# Altium PCB Copy2 of PCB1.PcbDoc
Units mm, origin at the board's own origin, x right, y up, seen from the top; angles counter-clockwise.
Board outline 100 x 25 mm, 2 copper layers (Top Layer, Bottom Layer); 22 components, 34 nets, 106 pads, 35 vias.
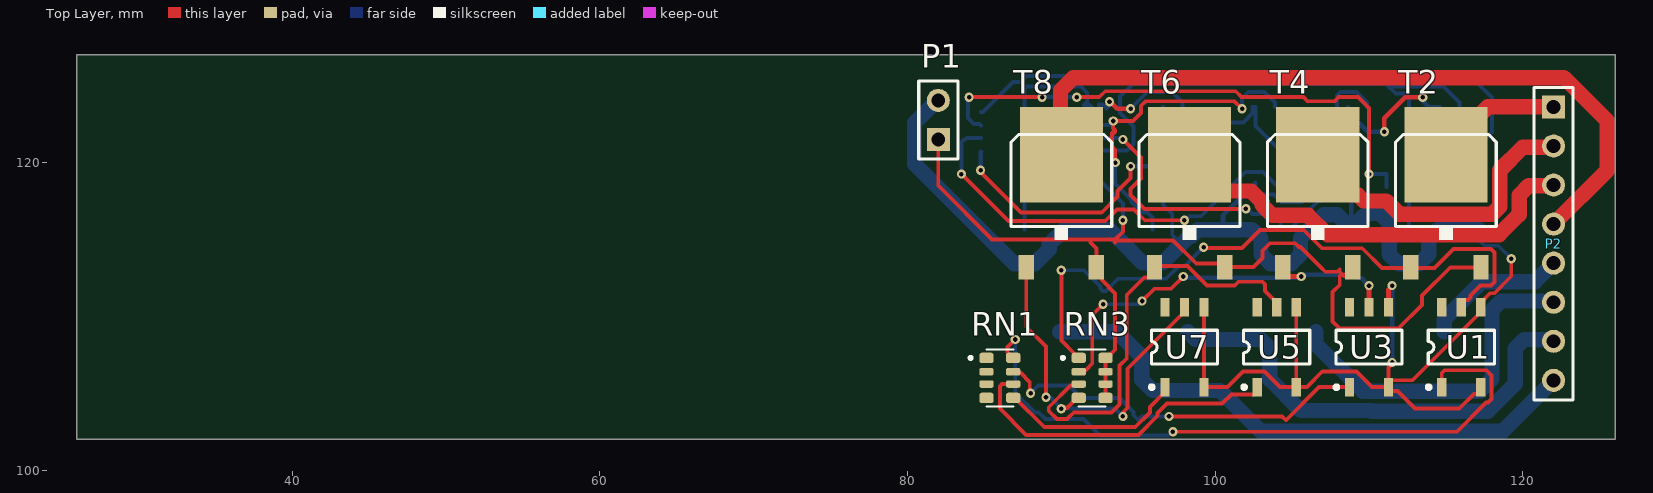
[diagram p0: Top Layer view]
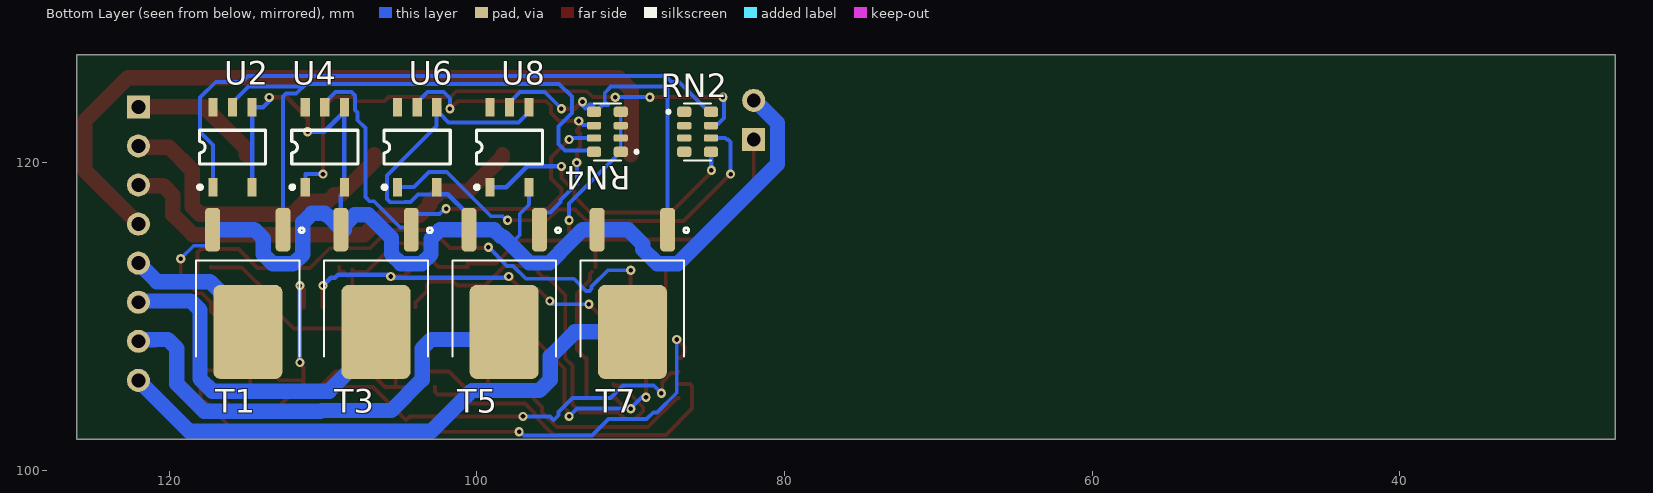
[diagram p1: Bottom Layer view, seen from below]

## Layer stack, top to bottom
Top Solder: solder mask 0.0102, Solder Resist, Dk 3.5
Top Layer: signal copper 0.0356
Dielectric 1: dielectric 0.32, FR-4, Dk 4.8
Bottom Layer: signal copper 0.0356
Bottom Solder: solder mask 0.0102, Solder Resist, Dk 3.5

## Board outline
26,127 126,127 126,102 26,102

## Design rules (kind name [scope] priority, off if disabled: settings)
Clearance [All] p1: gap=0.256 ignorepadtopadclearanceinfootprint=FALSE
PolygonConnect [All] p1: connectstyle=Relief reliefconductorwidth=0.254 reliefentries=4 polygonreliefangle="90 Angle" airgapwidth=0.254
RoomDefinition SheetBridge1 [InComponentClass('SheetBridge1')] p1: confinementstyle=ConfineIn formatcopy=TRUE lockcomponents=FALSE outline 131.854,101.316 186.464,101.316 186.464,124.684 131.854,124.684
RoutingVias [All] p1: holewidth=0.3 width=0.6 viastyle="Through Hole" minholewidth=0.3 minwidth=0.6 maxholewidth=0.6 maxwidth=1.27
SolderMaskExpansion [All] p1: expansion=0.102 istentingtop=FALSE
Width [All] p1: maxlimit=1 minlimit=0.254 preferedwidth=0.6 minimp=50.000000 maximp=50.000000 favimp=50.000000
30 further rules are at their usual default settings.

## Classes and differential pairs
component class SheetBridge1: P1 P2 RN1 RN2 RN3 RN4 T1 T2 T3 T4 T7 T8 U1 U2 U3 U5 U6 U7 U8

## Components (designator, comment, footprint, x,y, rotation, side; value= is the part's Value field where it differs from the comment)
P1 "Header 2" HDR1X2 82,121.5 r90 top
P2 "Header 8" HDR1X8 122,123.62 r270 top
RN1 "EXB-38V330GV" RESCAXS80P320X160X60-8N 86,106 r0 top
RN2 "EXB-38V330GV" RESCAXS80P320X160X60-8N 85.645,122 r180 bottom
RN3 "EXB-38V330GV" RESCAXS80P320X160X60-8N 92,106 r0 top
RN4 "EXB-38V330GV" RESCAXS80P320X160X60-8N 91.515,122 r0 bottom
T1 "IRLR120N" DPAK229P990X239-3N 114.887,111.5 r0 bottom
T2 "IRFR5305" D-PAK_TO252AA 115,118 r0 top
T3 "IRLR120N" DPAK229P990X239-3N 106.554,111.5 r0 bottom
T4 "IRFR5305" D-PAK_TO252AA 106.667,118 r0 top
T5 "IRLR120N" DPAK229P990X239-3N 98.22,111.5 r0 bottom
T6 "IRFR5305" D-PAK_TO252AA 98.333,118 r0 top
T7 "IRLR120N" DPAK229P990X239-3N 89.887,111.5 r0 bottom
T8 "IRFR5305" D-PAK_TO252AA 90,118 r0 top
U1 "4N25" SOP5(6) 116,108 r0 top
U2 "4N25" SOP5(6) 115.88,121 r180 bottom
U3 "4N25" SOP5(6) 110,108 r0 top
U4 "4N25" SOP5(6) 109.88,121 r180 bottom
U5 "4N25" SOP5(6) 104,108 r0 top
U6 "4N25" SOP5(6) 103.88,121 r180 bottom
U7 "4N25" SOP5(6) 98,108 r0 top
U8 "4N25" SOP5(6) 97.88,121 r180 bottom

## Footprints (in the part's own frame and the unit in brackets; to place one, negate y for a bottom-side part, rotate by r counter-clockwise, add the part's x,y. Pads: shape width x height; smd on the part's side, far side on the other; paste and mask are expansions set on the pad)
D-PAK_TO252AA [mm]
  rect 1x1.6 smd: 1(-2.28,-4.8) 3(2.28,-4.8)
  rect 5.4x6.2 smd: 4(0,2.5)
  silkscreen extent -3.27,-3.02 3.27,3.83
DPAK229P990X239-3N [mm]
  rrect50% 0.97x2.83 smd: 1(-2.29,-4.14) 2(2.29,-4.14)
  rrect20% 4.49x6.1 smd paste-4: 3(0,2.51)
  silkscreen extent -3.66,-4.26 3.37,4.1
HDR1X2 [mm] "Connector; Header; 2 Position"
  rect 1.5x1.5 hole 0.9: 1(0,0)
  round 1.5 hole 0.9: 2(2.54,0)
  silkscreen extent -1.27,-1.27 3.81,1.27
HDR1X8 [mm] "Connector; Header; 8 Position"
  rect 1.5x1.5 hole 0.9: 1(0,0)
  round 1.5 hole 0.9: 2(2.54,0) 3(5.08,0) 4(7.62,0) 5(10.16,0) 6(12.7,0) 7(15.24,0) 8(17.78,0)
  silkscreen extent -1.27,-1.27 19.05,1.27
RESCAXS80P320X160X60-8N [mm]
  rrect50% 0.93x0.68 smd: 1(-0.87,1.3) 4(-0.87,-1.3) 5(0.87,-1.3) 8(0.87,1.3)
  rrect50% 0.93x0.48 smd: 2(-0.87,0.4) 3(-0.87,-0.4) 6(0.87,-0.4) 7(0.87,0.4)
  silkscreen extent -2,-1.85 0.88,1.85
SOP5(6) [mm] "Small Outline; 6 Leads (1 Absent); Body Width 4.4 mm; Pitch 1.27 mm"
  rect 0.6x1.2 smd: 1(-1.27,-2.6) 3(1.27,-2.6) 4(1.27,2.6) 5(0,2.6) 6(-1.27,2.6)
  silkscreen extent -2.24,-2.72 2.15,1.1

## Part data
P1: "Header, 2-Pin", LatestRevisionDate=17-Jul-2002, LatestRevisionNote="Re-released for DXP Platform.", Publisher="Altium Limited"
P2: "Header, 8-Pin", LatestRevisionDate=17-Jul-2002, LatestRevisionNote="Re-released for DXP Platform.", Publisher="Altium Limited"
RN1 RN2 RN3 RN4: "Resistor Array, Chip, 4 elements CONVEX 1206 2%", Package="0603 Panasonic", Availability=Bad, Check_prices=https://www.snapeda.com/parts/EXB-38V330GV/Panasonic/view-part/1421932/?ref=eda, MF=Panasonic, MP=EXB-38V330GV, Price=None, SnapEDA_Link=https://www.snapeda.com/parts/EXB-38V330GV/Panasonic/view-part/1421932/?ref=snap
T1 T3 T5 T7: "N-Channel 100V 10A _Tc_ 48W _Tc_ Surface Mount D-Pak", Package="TO-252 International Rectifier", Availability=Unavailable, MF="Infineon Technologies", MP=IRLR120N, Price=None, SnapEDA_Link=https://www.snapeda.com/parts/IRLR120N/Infineon%20Technologies/view-part/182771/?ref=snap
T2 T4 T6 T8: "P-Channel 55V 31A _Tc_ 110W _Tc_ Surface Mount D-Pak", Package="TO-252-3 Infineon Technologies", Availability=Unavailable, MF="Infineon Technologies", MP=IRFR5305, Price=None, SnapEDA_Link=https://www.snapeda.com/parts/IRFR5305/Infineon%20Technologies/view-part/2877715/?ref=snap
U1 U2 U3 U4 U5 U6 U7 U8: library part Optoisolator2, "5 Pin Mini Flat Pack Optocoupler", DatasheetVersion=Apr-2004, LatestRevisionDate=04-Mar-2005, LatestRevisionNote="PCB Footprint replaced, Sch pins re-numbered.", PackageDescription="Small Outline; 6 Leads (1 Absent); Body Width 4.4 mm; Pitch 1.27 mm", PackageReference=SOP5(6), Published=24-Mar-1999, Publisher="Altium Limited"

## Via types
v1: diameter 0.6, hole 0.3, Top Layer to Bottom Layer, 35 vias

## Nets (pads, with @x,y where several pads share a name; then routed paths per layer and width w, separated by ;. In a path a pad name is that pad's centre, name@x,y a point inside that pad or via, vN(x,y) a via of type N, cw(c..) or ccw(c..) an arc to the next point about the centre after c; other vN are vias at no path point)
+12: P1.1 RN3.5 RN3.6 RN3.7 RN3.8 RN4.1 RN4.2 RN4.3 RN4.4 T2.3 T4.3 T6.3 T8.3 | length 70.5
  Top Layer w0.254: P1.1 82,118.5 85.5,115 91.894,115 93.5,115 ; 91.894,114.8 92.28,114.414 T8.3 ; T8.3@92.5,112.9 92.63,112.77 92.63,112.37 93.5,111.5 93.5,107.828 92.972,107.3 RN3.8 RN3.7 RN3.6 RN3.5 ; 93.5,114.8 93.5,115 ; v1(94,116.25) 94,115.5 93.5,115 ; 108.1,112.614 108.1,112.044 107.63,111.574 107.63,109.669 108.099,109.2 111.901,109.2 113.45,110.749 113.45,111.351 115.28,113.181 117.28,113.181 T2.3 ; 108.373,112.627 108.1,112.9 108.1,113.044 107.955,112.9 107.155,112.9 106.884,113.171 105.555,114.5 105.456,114.5 105.2,114.756 103.574,114.756 103.087,114.269 103.087,113.786 102.501,113.2 T6.3 100.613,113.444 98.767,113.444 97.267,114.944 93.556,114.944 93.5,115 ; 108.445,112.699 108.647,112.9 108.947,112.9 T4.3
  Bottom Layer w0.254: RN4.4 RN4.3 RN4.2 RN4.1 90.759,120.7 90.948,120.512 90.948,120.397 94,117.345 v1(94,116.25)
GND: P1.2 T1.2 T3.2 T5.2 T7.2 U1.3 U1.4 U2.3 U2.4 U3.3 U3.4 U4.3 U4.4 U5.3 U5.4 U6.3 U6.4 U7.3 U7.4 U8.3 U8.4 | length 159.9
  Top Layer w0.254: U7.4 U7.3 100.806,105.4 101.812,106.406 103.198,106.406 104.204,105.4 U5.3 ; U5.4 U5.3 ; v1(111.5,107) 111.5,106.919 111.27,106.689 U3.3@111.27,105.7 ; U1.3 117.27,105.1 117.12,104.95 116.82,104.95 115.87,104 113,104 111.844,105.156 111.42,105.156 111.27,105.306 U3.3 ; v1(119.25,113.75) 119.25,112.607 118.15,111.507 117.877,111.507 117.27,110.9 U1.4 117.27,110.3 112.82,105.85 111.42,105.85 U3.3@111.27,105.7 ; U5.3 105.958,105.4 106.964,106.406 109.198,106.406 110.204,105.4 U3.3 ; U3.3 U3.3@111.27,105.7
  Top Layer w0.3: v1(111,122) 111,122.874 112.364,124.238 v1(113.5,124.238) ; U3.4 111.27,111.77 v1(111.5,112)
  Bottom Layer w0.254: U8.4@96.46,123.15 U8.4@96.61,123.3 ; U8.3 96.61,117.26 97.209,116.66 97.209,115.291 97.809,114.691 ; U8.4 U8.4@96.61,123.3 ; U6.3 102.61,118.1 102.783,117.927 103.836,117.927 104.325,117.438 104.67,117.438 104.691,117.417 105.609,117.417 105.833,117.641 105.833,119.159 102.61,122.382 U6.4 102.433,123.6 102.433,123.217 101.833,122.617 97.293,122.617 U8.4@96.61,123.3 ; T1.2 117.177,114.944 117.526,114.594 118.406,114.594 v1(119.25,113.75)
  Bottom Layer w0.3: U8.3@96.46,118.85 96.61,118.7 U8.3 ; T5.2 100.51,116.57 101.89,117.95 102.46,117.95 U6.3@102.61,118.1 ; U6.3 U6.3@102.61,118.7 ; U4.4 U4.4@108.61,123.3 ; T3.2 108.844,117.866 108.61,118.1 U4.3 U4.4@108.61,123.3 ; v1(111,122) 109.91,122 U4.4@108.61,123.3 ; v1(111.5,107) v1(111.5,112) ; v1(113.5,124.238) 113.5,124 113.9,123.6 U2.4 U2.3
  Bottom Layer w1: P1.2 81.909,124.04 80.45,122.581 80.45,119.898 86.923,113.425 88.271,113.425 89.217,114.37 89.217,114.695 90.162,115.64 T7.2 93.117,115.64 94.645,114.111 94.645,114.098 95.274,113.469 96.586,113.469 97.809,114.691 98.311,115.194 98.437,115.194 98.868,115.625 T5.2@100.495,115.625 ; T5.2 102.393,115.64 102.979,115.054 102.979,114.036 103.589,113.425 104.938,113.425 105.549,114.036 105.549,115.104 107.044,116.6 107.955,116.6 108.6,115.955 108.6,115.64 T3.2 108.859,115.655 108.859,115.727 109.687,116.555 109.759,116.555 109.898,116.694 110.726,116.694 111.312,116.108 111.312,114.036 111.923,113.425 113.271,113.425 113.882,114.036 113.882,115.054 114.468,115.64 T1.2
NetP2_1: P2.1 T2.4 | length 8.5
  Top Layer w1: T2.4 115,120.9 117.72,123.62 P2.1
NetP2_2: P2.2 T4.4 | length 20.4
  Top Layer w1: T4.4 106.667,120.1 108.867,117.9 109.267,117.9 109.667,117.5 111.131,117.5 111.987,116.644 118.013,116.644 118.5,117.131 118.5,119.5 120,121 121.92,121 P2.2
NetP2_3: P2.3 T6.4 | length 28.1
  Top Layer w1: T6.4 98.333,120.351 100.533,118.151 102.343,118.151 103.056,117.437 103.056,117.242 103.73,116.568 106.05,116.568 107.306,115.312 118.457,115.312 119.756,116.611 119.756,117.87 120.386,118.5 121.96,118.5 P2.3
NetP2_4: P2.4 T8.4 | length 49.4
  Top Layer w1: T8.4 89.944,120.556 89.944,124.687 90.775,125.518 122.671,125.518 125.5,122.689 125.5,119.5 P2.4
NetP2_5: P2.5 T1.3 | length 9.4
  Bottom Layer w1: T1.3 114.887,109.795 117.348,112.256 120.796,112.256 P2.5
NetP2_6: P2.6 T3.3 | length 22.6
  Bottom Layer w1: T3.3 106.554,108.185 109.599,105.14 117.2,105.14 118,105.94 118,110.414 118.586,111 121.92,111 P2.6
NetP2_7: P2.7 T5.3 | length 30.4
  Bottom Layer w1: T5.3 98.71,108.5 102.967,108.5 103.553,107.914 103.553,105.89 105.558,103.884 110.116,103.884 110.16,103.84 117.739,103.84 119.5,105.601 119.5,107.914 120.086,108.5 120.914,108.5 120.939,108.476 121.904,108.476 P2.7
NetP2_8: P2.8 T7.3 | length 37
  Bottom Layer w1: T7.3 93.632,108.99 95.219,107.403 95.219,105.89 95.925,105.184 100.316,105.184 102.96,102.54 118.7,102.54 P2.8
NetRN1_1: RN1.1
NetRN1_2: RN1.2
NetRN1_3: RN1.3
NetRN1_4: RN1.4
NetRN1_5: RN1.5 U7.1 | length 12.1
  Top Layer w0.254: RN1.5 86.995,104.7 88.888,102.807 94.807,102.807 95.75,103.75 95.75,104.12 96.73,105.1 U7.1
NetRN1_6: RN1.6 U5.1 | length 21.4
  Top Layer w0.254: RN1.6 86.149,105.6 86,105.451 86,104 87.703,102.297 95.018,102.297 96.26,103.539 96.26,103.726 96.861,104.326 100.454,104.326 101.054,104.927 102.557,104.927 102.73,105.1 U5.1
NetRN1_7: RN1.7 U3.1 | length 25.2
  Top Layer w0.254: RN1.7 86.96,106.31 87.369,106.31 87.943,105.736 87.943,105.057 v1(88,105) ; v1(97,103.5) 104.344,103.5 104.594,103.25 106.744,105.4 U3.1
  Bottom Layer w0.254: v1(88,105) 88.5,105.5 90.5,105.5 91.317,104.683 93.783,104.683 94.683,103.783 94.683,103.572 95.005,103.25 95.255,103.5 v1(97,103.5)
NetRN1_8: RN1.8 U1.1 | length 44.1
  Top Layer w0.254: RN1.8 86.756,107.3 86.567,107.488 86.567,107.603 86.5,107.67 86.5,108 v1(87,108.5) ; v1(97.25,102.5) 115.72,102.5 117.614,104.394 117.738,104.394 117.976,104.632 117.976,106.168 117.644,106.5 114.906,106.5 114.73,106.324 U1.1
  Bottom Layer w0.254: v1(87,108.5) 87,105.034 88.284,103.75 88.529,103.75 88.962,103.317 91.433,103.317 92.5,102.25 96.928,102.25 97.178,102.5 v1(97.25,102.5)
NetRN2_1: RN2.1
NetRN2_2: RN2.2
NetRN2_3: RN2.3
NetRN2_4: RN2.4
NetRN2_5: RN2.5 U8.1 | length 19.3
  Top Layer w0.254: v1(84.75,119.5) 84.75,119.376 87.376,116.75 92.624,116.75 93.655,117.781 93.655,118.155 94.5,119 v1(94.5,119.75)
  Bottom Layer w0.3: v1(84.75,119.5) 84.762,119.512 84.762,120.688 RN2.5 ; v1(94.5,119.75) 96.734,119.75 98.084,118.4 U8.1
NetRN2_6: RN2.6 U6.1 | length 28.7
  Top Layer w0.254: v1(83.5,119.25) 86.556,116.194 92.854,116.194 93.616,116.956 94.717,116.956 95.423,116.25 v1(98,116.25)
  Bottom Layer w0.254: v1(83.5,119.25) 83.5,121.324 83.676,121.5 83.75,121.5 83.85,121.6 RN2.6 ; v1(98,116.25) 98.072,116.25 98.33,116.508 99.079,116.508 101.958,119.387 103.097,119.387 104.084,118.4 U6.1
NetRN2_7: RN2.7 U4.1 | length 35.6
  Top Layer w0.254: v1(84,124.25) v1(88.75,124.25) ; v1(91,124.25) 92.465,124.25 92.851,124.635 101.335,124.635 101.721,124.25 105.75,124.25 106.017,123.983 107.75,123.983 108,124.233 108,124.25 109.291,124.25 110,123.541 v1(110,119.25)
  Bottom Layer w0.254: v1(84,124.25) 84,124.156 83.927,124.083 83.927,122.901 84.315,122.513 84.662,122.513 RN2.7 ; v1(88.75,124.25) v1(91,124.25) ; v1(110,119.25) 111.15,119.25 U4.1
NetRN2_8: RN2.8 U2.1 | length 40.9
  Bottom Layer w0.254: RN2.8 84.9,123.3 86.85,125.25 87.341,125.25 87.717,125.626 114.875,125.626 115.251,125.25 116.974,125.25 118,124.224 118,122 117.15,121.15 U2.1
NetRN3_1: RN3.1 T2.1 U1.5 | length 43.4
  Top Layer w0.254: v1(90,113) 90,108.43 90.827,107.603 90.827,107.488 91.016,107.3 RN3.1 ; v1(99.25,114.5) 99.299,114.45 101.75,114.45 102.913,115.613 105.756,115.613 106.94,114.429 109.559,114.429 110.838,113.151 112.671,113.151 T2.1 112.769,113.151 114.268,113.151 115.5,114.383 117.939,114.383 118.163,114.159 118.163,112.241 117.939,112.017 117.245,112.017 116.587,111.359 116.587,111.222 116.438,111.073 116.173,111.073 116,110.9 U1.5
  Bottom Layer w0.254: v1(90,113) 91.483,113 92.538,111.945 92.538,111.796 92.687,111.647 92.897,111.647 93.696,112.446 96.812,112.446 97.645,113.279 98.029,113.279 v1(99.25,114.5)
NetRN3_2: RN3.2 T4.1 U3.5 | length 26.7
  Top Layer w0.254: RN3.2 91.243,106.513 91.59,106.513 92.008,106.93 92.008,110.083 v1(92.713,110.788) ; v1(95.25,111) 96.048,111.798 97.13,111.798 v1(97.928,112.596)
  Top Layer w0.3: T4.1 104.387,112.946 104.737,112.596 v1(105.592,112.596) ; U3.5 v1(110,112)
  Bottom Layer w0.254: v1(92.713,110.788) 95.038,110.788 v1(95.25,111)
  Bottom Layer w0.3: v1(97.928,112.596) 98.005,112.519 105.515,112.519 v1(105.592,112.596) 105.664,112.596 105.784,112.716 109.004,112.716 109.22,112.5 109.5,112.5 v1(110,112)
NetRN3_3: RN3.3 T6.1 U5.5 | length 27.8
  Top Layer w0.254: RN3.3 91.04,105.51 90.598,105.51 89.183,104.095 89.183,103.851 89.717,103.317 90.376,103.317 90.809,103.75 93.265,103.75 93.787,104.272 93.787,106.808 94.25,107.271 94.25,111.397 95.388,112.535 95.68,112.535 96.053,112.908 T6.1 96.132,113.279 98.211,113.279 99.473,112.017 101.272,112.017 101.505,112.25 103.074,112.25 103.25,112.074 103.25,111.65 104,110.9 U5.5
NetRN3_4: RN3.4 T8.1 U7.5 | length 24.7
  Top Layer w0.254: T8.1 87.72,109.325 89,108.045 v1(89,104.75) ; 90.362,104.057 RN3.4@91.005,104.7 ; v1(94,103.5) 94,103.764 94.297,104.061 94.297,106.597 98,110.3 U7.5
  Top Layer w0.3: v1(90,104) 90.057,104.057 90.362,104.057 ; RN3.4@91.005,104.7 RN3.4
  Bottom Layer w0.254: v1(89,104.75) 89.25,104.75 v1(90,104) 93.5,104 v1(94,103.5)
NetRN4_5: RN4.5 T7.1 U8.5 | length 23.1
  Top Layer w0.3: v1(93.134,123.952) 93.181,123.952 93.634,123.5 v1(94.5,123.5)
  Bottom Layer w0.254: T7.1 87.597,124.784 87.746,124.933 91.283,124.933 91.683,124.533 91.683,123.967 91.454,123.738 91.822,123.738 92.26,123.3 RN4.5 92.443,123.358 92.443,123.767 92.676,123.767 92.943,123.5 93.134,123.691 v1(93.134,123.952) ; v1(94.5,123.5) 95.583,124.583 97.197,124.583 97.88,123.9 U8.5
NetRN4_6: RN4.6 T5.1 U6.5 | length 23
  Top Layer w0.254: v1(93.5,120) 93.5,120.834 93.294,121.04 93.294,121.794 ; v1(101.75,123.5) 101.267,123.983 95.475,123.983 95.187,123.696 95.187,123.222 94.667,122.701 v1(93.367,122.701) 93.367,122.249 93.5,122.116 ; 93.294,121.794 93.294,121.91 93.5,122.116 ; 93.294,121.794 93.5,122 93.5,122.116
  Bottom Layer w0.254: RN4.6 92.435,122.45 93.116,122.45 v1(93.367,122.701) ; v1(93.5,120) 93.5,118.631 94.556,117.575 94.556,117.444 95.248,116.752 95.602,116.752 95.93,116.424 T5.1 ; v1(101.75,123.5) 101.75,124.181 102.151,124.583 103.197,124.583 103.88,123.9 U6.5
NetRN4_7: RN4.7 T3.1 U4.5 | length 30.5
  Top Layer w0.254: v1(94,121.5) 95.183,120.317 95.183,118.962 94.5,118.279 94.5,117.894 95.4,116.994 101.994,116.994 v1(102,117)
  Bottom Layer w0.254: RN4.7 93.819,121.6 93.919,121.5 v1(94,121.5) ; v1(102,117) 102.081,117 102.419,116.663 103.936,116.663 104.264,116.335 T3.1 104.409,115.785 104.981,115.785 106.678,117.483 106.983,117.483 107.25,117.75 107.25,122.25 107.75,122.75 107.75,123.25 107.927,123.427 107.927,124.359 108.151,124.583 109.197,124.583 109.88,123.9 U4.5
NetRN4_8: RN4.8 T1.1 U2.5 | length 39.4
  Bottom Layer w0.254: RN4.8 92.479,120.794 94.26,120.794 94.683,121.217 94.683,122.351 93.817,123.217 93.817,124.149 93.817,124.283 94.65,125.116 111.108,125.116 111.28,124.944 ; T1.1 112.597,124.293 112.408,124.482 111.742,124.482 111.618,124.606 111.28,124.944 ; U2.5 115.88,123.9 114.836,124.944 111.28,124.944
pads on no net: U1.6 U2.6 U3.6 U4.6 U5.6 U6.6 U7.6 U8.6

## Polygon pours and split planes (outlines as drawn)
no net on Mechanical 1 "GND" (solid): 26,127 26,126 126,126 126,127